# EAGLE board gamyba (EAGLE 8.4.1), part 1 of 3
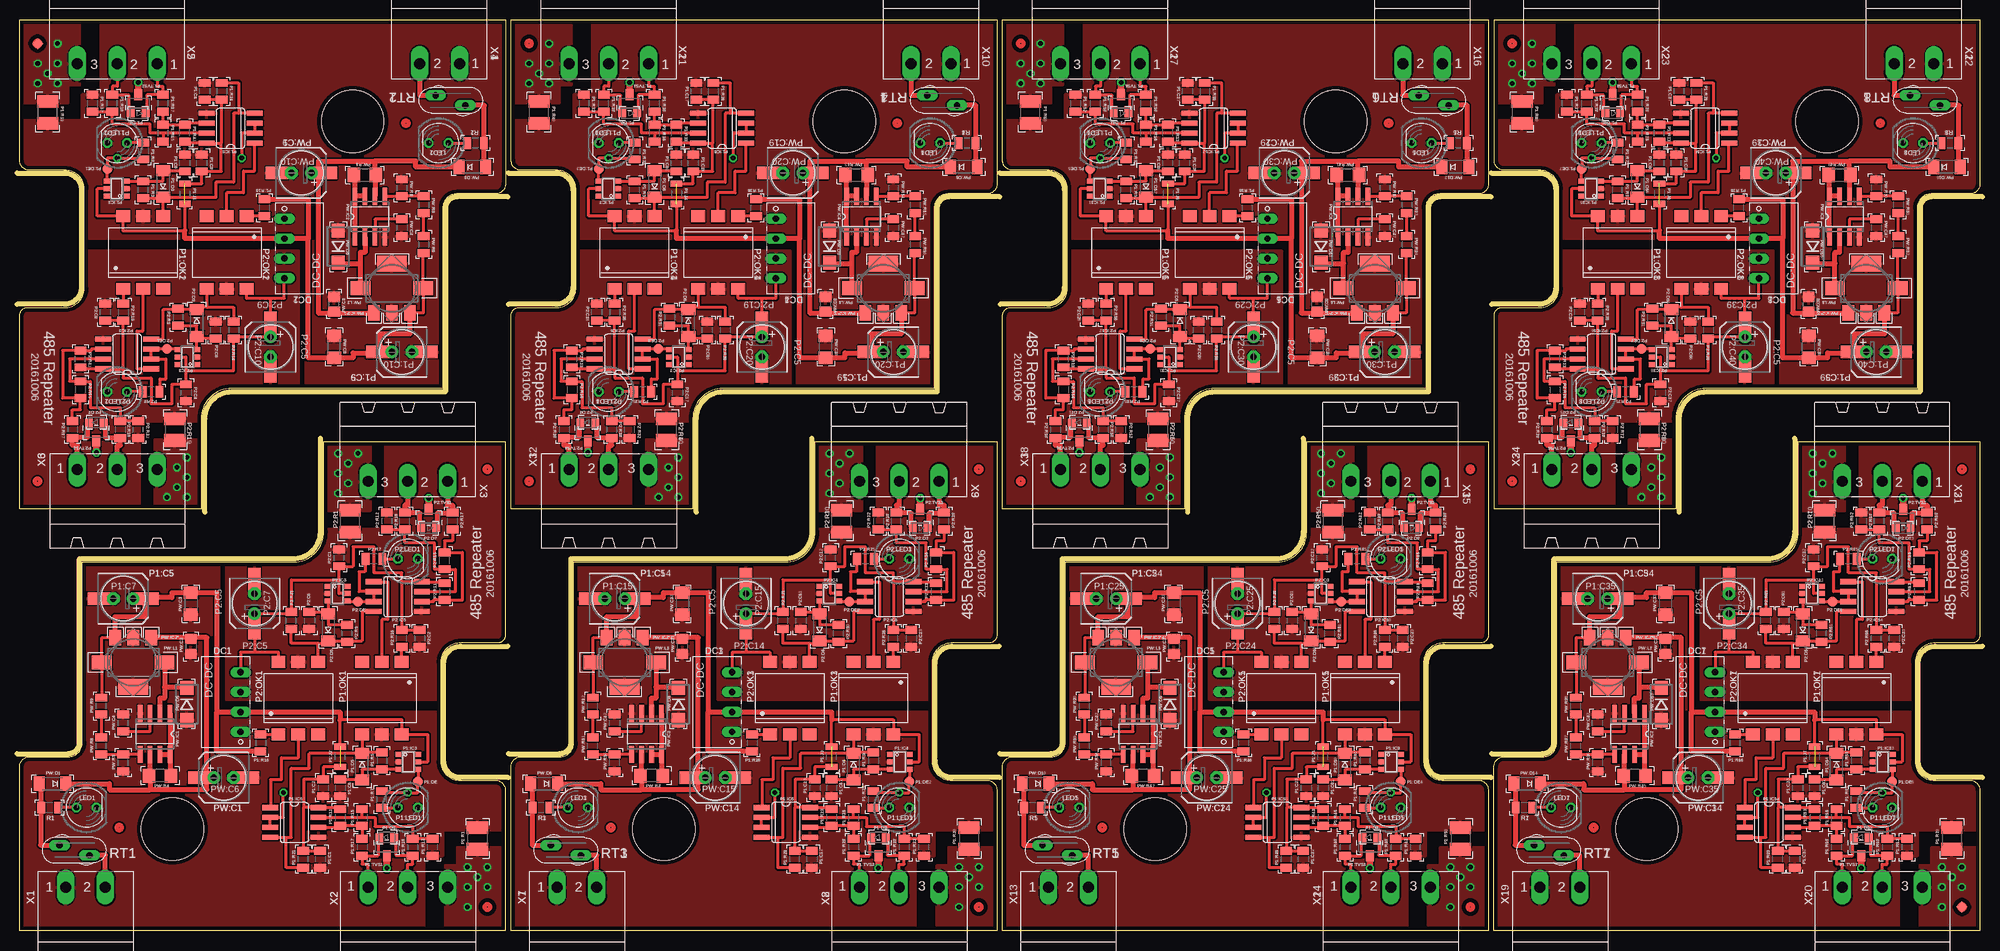
[diagram p0: board, top side]
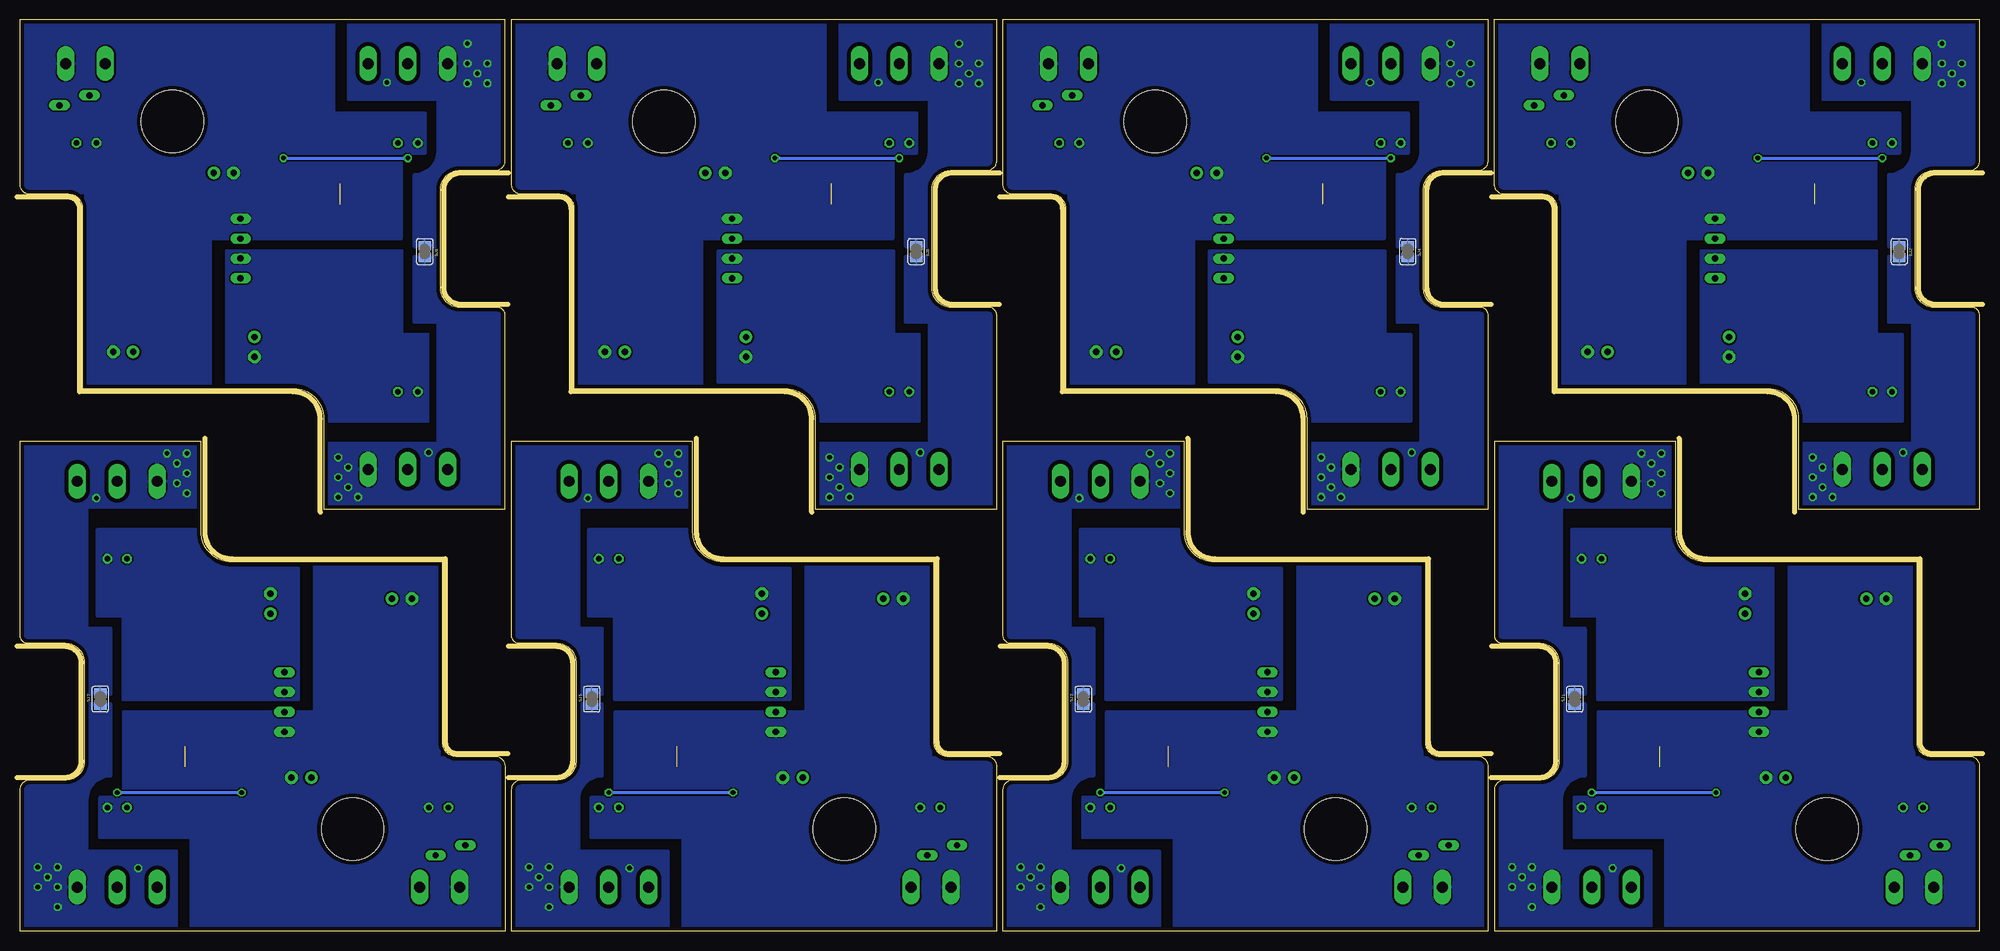
[diagram p1: board, bottom side, seen from below]

Size 250.23 x 116.37 mm. Coordinates in mm from the lower left corner, seen from the top.
Copper layers (1*16): Top 0.035mm / dielectric 1.5mm / Bottom 0.035mm
Design rules "default *": minimum track width 10mil, minimum drill 20mil, track to track 8mil, track to pad 8mil, pad to pad 8mil, via to via 8mil, smd to smd 8mil, copper to edge 20mil, drill to drill 8mil, minimum pad ring 10mil, minimum via ring 8mil, stop-mask expansion 4mil, vias tented up to drill 40mil, thermal gap 6mil
Net classes: 0 default: clearance 0.205 mm; 1 power: clearance 0.205 mm to class 0, clearance 0.305 mm; 2 pe: clearance 0.205 mm to class 0, clearance 0.205 mm to class 1, clearance 0.508 mm
Milling: 92 lines

## Footprints (pad centres in the part's own frame; a part is rotated, then mirrored left to right if it is on the bottom)
NME = drill 0.813 long: 1 0,3.81; 2 0,1.27; 3 0,-1.27; 4 0,-3.81
TP2 = smd 1 x 1 rotated 45: P$1 0,0
LED5MM = drill 0.7 octagon: A -1.27,0; K 1.27,0
C0805 = smd 1 x 1.5: 1 -1.077,0; 2 1.077,0
SANYO-OSCON_SMD_C6 = smd 3.5 x 1.6: + 2.8,0; - -2.8,0
E2,5-6 = drill 0.813 pad 1.6: + -1.27,0 | drill 0.813 pad 1.6 octagon: - 1.27,0
SOD323-R = smd 0.6 x 0.6: A 1.1,0; C -1.1,0
MINIMELF = smd 1.4 x 1.8: A 1.7,0; C -1.7,0
B1,27 = smd 1.27 x 1.27: PP 0,0
SOT23-6 = smd 0.64 x 0.8: 1 -0.95,-1.29; 2 0,-1.29; 3 0.95,-1.29; 4 0.95,1.173; 5 0,1.173; 6 -0.95,1.173
SO08 = smd 0.66 x 2.032: 1 -1.905,-3.073; 2 -0.635,-3.073; 3 0.635,-3.073; 4 1.905,-3.073; 5 1.905,3.073; 6 0.635,3.073; 7 -0.635,3.073; 8 -1.905,3.073
JUMPER_0805 = smd 0.8 x 1.5: 1 -1.3,0; 2 1.3,0
DIL6-SMD = smd 1.78 x 1.52: 1 -2.54,-4.645; 2 0,-4.645; 3 2.54,-4.645; 4 2.54,4.645; 5 0,4.645; 6 -2.54,4.645
R1210 = smd 1.6 x 2.7: 1 -1.4,0; 2 1.4,0
R0805 = smd 1 x 1.5: 1 -1.077,0; 2 1.077,0
SOT23 = smd 1 x 1.4: 1 -0.95,-1.1; 2 0.95,-1.1; 3 0,1.1
C0805' = smd 1.3 x 1.5: 1 -0.95,0; 2 0.95,0
C1206 = smd 1.6 x 1.8: 1 -1.4,0; 2 1.4,0
DO214BA = smd 1.8 x 1.7: A 2.05,0; C -2.05,0
SO08' = smd 0.6 x 2.2: 1 -1.905,-2.6; 2 -0.635,-2.6; 3 0.635,-2.6; 4 1.905,-2.6; 5 1.905,2.6; 6 0.635,2.6; 7 -0.635,2.6; 8 -1.905,2.6
SOT223 = smd 1.5 x 2: 1 -2.3,-3.15; 2 0,-3.15; 3 2.3,-3.15 | smd 3.8 x 2: 4 0,3.15
DR1030 = smd 2.54 x 1.8: 1 -4,0; 2 4,0
R1206 = smd 1.6 x 1.803: 1 -1.422,0; 2 1.422,0
X40 = drill 0.813 long: 1 0,0; 2 3.81,-1.27
SJ = smd 1.168 x 1.6: 1 -0.762,0; 2 0.762,0
PLOKSTE_ISPJAUTA = hole 8: -11,-18
MSTBA2 = drill 1.4 long: 1 -2.54,5.08; 2 2.54,5.08
MSTBA3 = drill 1.4 long: 1 -5.08,5.08; 2 0,5.08; 3 5.08,5.08

## Placement (x,y rotation side)
DC1  5V/5V  [NME]  28.21,29.23 180 top
DC2  5V/5V  [NME]  33.8,87.14 0 top
DC3  5V/5V  [NME]  90.95,29.23 180 top
DC4  5V/5V  [NME]  96.54,87.14 0 top
DC5  5V/5V  [NME]  153.69,29.23 180 top
DC6  5V/5V  [NME]  159.28,87.14 0 top
DC7  5V/5V  [NME]  216.43,29.23 180 top
DC8  5V/5V  [NME]  222.02,87.14 0 top
E$1  REF  [TP2]  2.31,113.31 0 top
E$2  REF  [TP2]  -10.16,-9.52 0 top  (outside the outline)
E$3  REF  [TP2]  247.92,3.07 0 top
E$4  REF  [TP2]  259.84,126.48 0 top  (outside the outline)
LED1  Power  [LED5MM]  8.53,15.77 0 top
LED2  Power  [LED5MM]  53.49,100.6 180 top
LED3  Power  [LED5MM]  71.27,15.77 0 top
LED4  Power  [LED5MM]  116.22,100.6 180 top
LED5  Power  [LED5MM]  134,15.77 0 top
LED6  Power  [LED5MM]  178.96,100.6 180 top
LED7  Power  [LED5MM]  196.74,15.77 0 top
LED8  Power  [LED5MM]  241.7,100.6 180 top
P1:C1  0.1  [C0805]  38.37,9.16 270 top
P1:C2  0.1  [C0805]  38.76,18.31 270 top
P1:C3  0.1  [C0805]  21.1,98.06 90 top
P1:C4  0.1  [C0805]  23.64,107.21 90 top
P1:C5  100x10V  [SANYO-OSCON_SMD_C6]  13.23,42.44 0 top
P1:C6  0.1  [C0805]  40.91,18.31 270 top
P1:C7  100x10V  [E2,5-6]  13.23,42.44 180 top
P1:C8  0.1  [C0805]  23.26,98.06 90 top
P1:C9  100x10V  [SANYO-OSCON_SMD_C6]  48.79,73.93 180 top
P1:C10  100x10V  [E2,5-6]  48.79,73.93 0 top
P1:C11  0.1  [C0805]  103.65,18.31 270 top
P1:C12  0.1  [C0805]  101.11,9.16 270 top
P1:C13  0.1  [C0805]  101.49,18.31 270 top
P1:C14  100x10V  [SANYO-OSCON_SMD_C6]  75.97,42.44 0 top
P1:C15  100x10V  [E2,5-6]  75.97,42.44 180 top
P1:C16  0.1  [C0805]  83.84,98.06 90 top
P1:C17  0.1  [C0805]  86.38,107.21 90 top
P1:C18  0.1  [C0805]  86,98.06 90 top
P1:C19  100x10V  [SANYO-OSCON_SMD_C6]  111.53,73.93 180 top
P1:C20  100x10V  [E2,5-6]  111.53,73.93 0 top
P1:C21  0.1  [C0805]  166.39,18.31 270 top
P1:C22  0.1  [C0805]  163.85,9.16 270 top
P1:C23  0.1  [C0805]  164.23,18.31 270 top
P1:C24  100x10V  [SANYO-OSCON_SMD_C6]  138.7,42.44 0 top
P1:C25  100x10V  [E2,5-6]  138.7,42.44 180 top
P1:C26  0.1  [C0805]  146.58,98.06 90 top
P1:C27  0.1  [C0805]  149.12,107.21 90 top
P1:C28  0.1  [C0805]  148.74,98.06 90 top
P1:C29  100x10V  [SANYO-OSCON_SMD_C6]  174.26,73.93 180 top
P1:C30  100x10V  [E2,5-6]  174.26,73.93 0 top
P1:C31  0.1  [C0805]  229.13,18.31 270 top
P1:C32  0.1  [C0805]  226.59,9.16 270 top
P1:C33  0.1  [C0805]  226.97,18.31 270 top
P1:C34  100x10V  [SANYO-OSCON_SMD_C6]  201.44,42.44 0 top
P1:C35  100x10V  [E2,5-6]  201.44,42.44 180 top
P1:C36  0.1  [C0805]  209.32,98.06 90 top
P1:C37  0.1  [C0805]  211.86,107.21 90 top
P1:C38  0.1  [C0805]  211.48,98.06 90 top
P1:C39  100x10V  [SANYO-OSCON_SMD_C6]  237,73.93 180 top
P1:C40  100x10V  [E2,5-6]  237,73.93 0 top
P1:D1  PESD1LIN  [SOD323-R]  15.13,104.41 180 top
P1:D2  BAS85  [MINIMELF]  18.31,95.4 90 top
P1:D3  PESD1LIN  [SOD323-R]  109.62,11.96 0 top
P1:D4  BAS85  [MINIMELF]  106.45,20.98 270 top
P1:D5  BAS85  [MINIMELF]  43.71,20.98 270 top
P1:D6  PESD1LIN  [SOD323-R]  77.87,104.41 180 top
P1:D7  PESD1LIN  [SOD323-R]  46.88,11.96 0 top
P1:D8  BAS85  [MINIMELF]  81.05,95.4 90 top
P1:D9  PESD1LIN  [SOD323-R]  172.36,11.96 0 top
P1:D10  BAS85  [MINIMELF]  169.18,20.98 270 top
P1:D11  PESD1LIN  [SOD323-R]  140.61,104.41 180 top
P1:D12  BAS85  [MINIMELF]  143.78,95.4 90 top
P1:D13  PESD1LIN  [SOD323-R]  235.1,11.96 0 top
P1:D14  BAS85  [MINIMELF]  231.92,20.98 270 top
P1:D15  PESD1LIN  [SOD323-R]  203.35,104.41 180 top
P1:D16  BAS85  [MINIMELF]  206.52,95.4 90 top
P1:DE  TPB1,27  [B1,27]  50.82,19.07 0 top
P1:DE1  TPB1,27  [B1,27]  11.2,97.3 180 top
P1:DE2  TPB1,27  [B1,27]  113.56,19.07 0 top
P1:DE3  TPB1,27  [B1,27]  73.93,97.3 180 top
P1:DE4  TPB1,27  [B1,27]  176.3,19.07 0 top
P1:DE5  TPB1,27  [B1,27]  136.67,97.3 180 top
P1:DE6  TPB1,27  [B1,27]  239.03,19.07 0 top
P1:DE7  TPB1,27  [B1,27]  199.41,97.3 180 top
P1:IC1  74LVC2G14DBV  [SOT23-6]  12.34,94.76 90 top
P1:IC2  MAX485CSA  [SO08]  26.94,102.51 90 top
P1:IC3  74LVC2G14DBV  [SOT23-6]  49.68,21.61 270 top
P1:IC4  74LVC2G14DBV  [SOT23-6]  112.41,21.61 270 top
P1:IC5  MAX485CSA  [SO08]  35.07,13.86 270 top
P1:IC6  MAX485CSA  [SO08]  97.81,13.86 270 top
P1:IC7  74LVC2G14DBV  [SOT23-6]  75.08,94.76 90 top
P1:IC8  MAX485CSA  [SO08]  89.68,102.51 90 top
P1:IC9  74LVC2G14DBV  [SOT23-6]  175.15,21.61 270 top
P1:IC10  MAX485CSA  [SO08]  160.55,13.86 270 top
P1:IC11  74LVC2G14DBV  [SOT23-6]  137.81,94.76 90 top
P1:IC12  MAX485CSA  [SO08]  152.42,102.51 90 top
P1:IC13  74LVC2G14DBV  [SOT23-6]  237.89,21.61 270 top
P1:IC14  MAX485CSA  [SO08]  223.29,13.86 270 top
P1:IC15  74LVC2G14DBV  [SOT23-6]  200.55,94.76 90 top
P1:IC16  MAX485CSA  [SO08]  215.16,102.51 90 top
P1:J1  0  [JUMPER_0805]  21.1,94.13 270 top
P1:J2  0  [JUMPER_0805]  40.91,22.25 90 top
P1:J3  0  [JUMPER_0805]  103.65,22.25 90 top
P1:J4  0  [JUMPER_0805]  83.84,94.13 270 top
P1:J5  0  [JUMPER_0805]  166.39,22.25 90 top
P1:J6  0  [JUMPER_0805]  146.58,94.13 270 top
P1:J7  0  [JUMPER_0805]  229.13,22.25 90 top
P1:J8  0  [JUMPER_0805]  209.32,94.13 270 top
P1:LED1  Link  [LED5MM]  49.55,15.77 0 top
P1:LED2  Link  [LED5MM]  12.47,100.6 180 top
P1:LED3  Link  [LED5MM]  112.29,15.77 0 top
P1:LED4  Link  [LED5MM]  75.2,100.6 180 top
P1:LED5  Link  [LED5MM]  175.03,15.77 0 top
P1:LED6  Link  [LED5MM]  137.94,100.6 180 top
P1:LED7  Link  [LED5MM]  237.76,15.77 0 top
P1:LED8  Link  [LED5MM]  200.68,100.6 180 top
P1:OK1  H11L1MS  [DIL6-SMD]  46.25,29.74 180 top
P1:OK2  H11L1MS  [DIL6-SMD]  15.77,86.63 0 top
P1:OK3  H11L1MS  [DIL6-SMD]  108.99,29.74 180 top
P1:OK4  H11L1MS  [DIL6-SMD]  78.51,86.63 0 top
P1:OK5  H11L1MS  [DIL6-SMD]  171.72,29.74 180 top
P1:OK6  H11L1MS  [DIL6-SMD]  141.24,86.63 0 top
P1:OK7  H11L1MS  [DIL6-SMD]  234.46,29.74 180 top
P1:OK8  H11L1MS  [DIL6-SMD]  203.98,86.63 0 top
P1:R1  101  [R1210]  58.44,11.83 270 top
P1:R2  103  [R0805]  15.77,94.64 90 top
P1:R3  202  [R0805]  9.29,105.68 270 top
P1:R4  202  [R0805]  21.1,101.87 90 top
P1:R5  103  [R0805]  46.25,21.74 270 top
P1:R6  121  [R0805]  18.31,101.87 90 top
P1:R7  103  [R0805]  46.25,16.78 90 top
P1:R8  103  [R0805]  15.77,99.59 270 top
P1:R9  100  [R0805]  18.31,105.68 90 top
P1:R10  100  [R0805]  11.83,105.68 90 top
P1:R11  202  [R0805]  40.91,14.5 270 top
P1:R12  202  [R0805]  52.73,10.69 90 top
P1:R13  471  [R0805]  31.26,92.35 90 top
P1:R14  472  [R0805]  25.8,107.21 270 top
P1:R15  121  [R0805]  43.71,14.5 270 top
P1:R16  471  [R0805]  30.75,24.02 270 top
P1:R17  100  [R0805]  43.71,10.69 270 top
P1:R18  100  [R0805]  50.19,10.69 270 top
P1:R19  101  [R1210]  3.58,104.54 90 top
P1:R20  103  [R0805]  108.99,21.74 270 top
P1:R21  472  [R0805]  36.21,9.16 90 top
P1:R22  202  [R0805]  115.46,10.69 90 top
P1:R23  202  [R0805]  103.65,14.5 270 top
P1:R24  121  [R0805]  106.45,14.5 270 top
P1:R25  103  [R0805]  108.99,16.78 90 top
P1:R26  100  [R0805]  106.45,10.69 270 top
P1:R27  100  [R0805]  112.92,10.69 270 top
P1:R28  471  [R0805]  93.49,24.02 270 top
P1:R29  472  [R0805]  98.95,9.16 90 top
P1:R30  101  [R1210]  121.18,11.83 270 top
P1:R31  103  [R0805]  78.51,94.64 90 top
P1:R32  202  [R0805]  72.03,105.68 270 top
P1:R33  202  [R0805]  83.84,101.87 90 top
P1:R34  121  [R0805]  81.05,101.87 90 top
P1:R35  103  [R0805]  78.51,99.59 270 top
P1:R36  100  [R0805]  81.05,105.68 90 top
P1:R37  100  [R0805]  74.57,105.68 90 top
P1:R38  471  [R0805]  94,92.35 90 top
P1:R39  472  [R0805]  88.54,107.21 270 top
P1:R40  101  [R1210]  66.31,104.54 90 top
P1:R41  103  [R0805]  171.72,21.74 270 top
P1:R42  202  [R0805]  178.2,10.69 90 top
P1:R43  202  [R0805]  166.39,14.5 270 top
P1:R44  121  [R0805]  169.18,14.5 270 top
P1:R45  103  [R0805]  171.72,16.78 90 top
P1:R46  100  [R0805]  169.18,10.69 270 top
P1:R47  100  [R0805]  175.66,10.69 270 top
P1:R48  471  [R0805]  156.23,24.02 270 top
P1:R49  472  [R0805]  161.69,9.16 90 top
P1:R50  101  [R1210]  183.92,11.83 270 top
P1:R51  103  [R0805]  141.24,94.64 90 top
P1:R52  202  [R0805]  134.77,105.68 270 top
P1:R53  202  [R0805]  146.58,101.87 90 top
P1:R54  121  [R0805]  143.78,101.87 90 top
P1:R55  103  [R0805]  141.24,99.59 270 top
P1:R56  100  [R0805]  143.78,105.68 90 top
P1:R57  100  [R0805]  137.31,105.68 90 top
P1:R58  471  [R0805]  156.74,92.35 90 top
P1:R59  472  [R0805]  151.28,107.21 270 top
P1:R60  101  [R1210]  129.05,104.54 90 top
P1:R61  103  [R0805]  234.46,21.74 270 top
P1:R62  202  [R0805]  240.94,10.69 90 top
P1:R63  202  [R0805]  229.13,14.5 270 top
P1:R64  121  [R0805]  231.92,14.5 270 top
P1:R65  103  [R0805]  234.46,16.78 90 top
P1:R66  100  [R0805]  231.92,10.69 270 top
P1:R67  100  [R0805]  238.4,10.69 270 top
P1:R68  471  [R0805]  218.97,24.02 270 top
P1:R69  472  [R0805]  224.43,9.16 90 top
P1:R70  101  [R1210]  246.65,11.83 270 top
P1:R71  103  [R0805]  203.98,94.64 90 top
P1:R72  202  [R0805]  197.5,105.68 270 top
P1:R73  202  [R0805]  209.32,101.87 90 top
P1:R74  121  [R0805]  206.52,101.87 90 top
P1:R75  103  [R0805]  203.98,99.59 270 top
P1:R76  100  [R0805]  206.52,105.68 90 top
P1:R77  100  [R0805]  200.05,105.68 90 top
P1:R78  471  [R0805]  219.48,92.35 90 top
P1:R79  472  [R0805]  214.01,107.21 270 top
P1:R80  101  [R1210]  191.79,104.54 90 top
P1:TVS1  SM712  [SOT23]  46.88,10.69 180 top
P1:TVS2  SM712  [SOT23]  15.13,105.68 0 top
P1:TVS3  SM712  [SOT23]  109.62,10.69 180 top
P1:TVS4  SM712  [SOT23]  77.87,105.68 0 top
P1:TVS5  SM712  [SOT23]  172.36,10.69 180 top
P1:TVS6  SM712  [SOT23]  140.61,105.68 0 top
P1:TVS7  SM712  [SOT23]  235.1,10.69 180 top
P1:TVS8  SM712  [SOT23]  203.35,105.68 0 top
P2:C1  0.1  [C0805]  40.79,47.64 90 top
P2:C2  0.1  [C0805]  51.07,37.36 270 top
P2:C3  0.1  [C0805]  25.04,76.73 90 top
P2:C4  0.1  [C0805]  21.23,68.73 270 top
P2:C5  100x10V  [SANYO-OSCON_SMD_C6]  29.99,41.8 270 top
P2:C6  0.1  [C0805]  36.98,39.64 270 top
P2:C7  100x10V  [E2,5-6]  29.99,41.8 90 top
P2:C8  0.1  [C0805]  10.94,79.01 90 top
P2:C9  100x10V  [SANYO-OSCON_SMD_C6]  32.02,74.57 90 top
P2:C10  100x10V  [E2,5-6]  32.02,74.57 270 top
P2:C11  0.1  [C0805]  99.72,39.64 270 top
P2:C12  0.1  [C0805]  103.53,47.64 90 top
P2:C13  0.1  [C0805]  113.81,37.36 270 top
P2:C14  100x10V  [SANYO-OSCON_SMD_C6]  92.73,41.8 270 top
P2:C15  100x10V  [E2,5-6]  92.73,41.8 90 top
P2:C16  0.1  [C0805]  87.78,76.73 90 top
P2:C17  0.1  [C0805]  83.97,68.73 270 top
P2:C18  0.1  [C0805]  73.68,79.01 90 top
P2:C19  100x10V  [SANYO-OSCON_SMD_C6]  94.76,74.57 90 top
P2:C20  100x10V  [E2,5-6]  94.76,74.57 270 top
P2:C21  0.1  [C0805]  162.45,39.64 270 top
P2:C22  0.1  [C0805]  166.26,47.64 90 top
P2:C23  0.1  [C0805]  176.55,37.36 270 top
P2:C24  100x10V  [SANYO-OSCON_SMD_C6]  155.47,41.8 270 top
P2:C25  100x10V  [E2,5-6]  155.47,41.8 90 top
P2:C26  0.1  [C0805]  150.51,76.73 90 top
P2:C27  0.1  [C0805]  146.7,68.73 270 top
P2:C28  0.1  [C0805]  136.42,79.01 90 top
P2:C29  100x10V  [SANYO-OSCON_SMD_C6]  157.5,74.57 90 top
P2:C30  100x10V  [E2,5-6]  157.5,74.57 270 top
P2:C31  0.1  [C0805]  225.19,39.64 270 top
P2:C32  0.1  [C0805]  229,47.64 90 top
P2:C33  0.1  [C0805]  239.29,37.36 270 top
P2:C34  100x10V  [SANYO-OSCON_SMD_C6]  218.21,41.8 270 top
P2:C35  100x10V  [E2,5-6]  218.21,41.8 90 top
P2:C36  0.1  [C0805]  213.25,76.73 90 top
P2:C37  0.1  [C0805]  209.44,68.73 270 top
P2:C38  0.1  [C0805]  199.16,79.01 90 top
P2:C39  100x10V  [SANYO-OSCON_SMD_C6]  220.24,74.57 90 top
P2:C40  100x10V  [E2,5-6]  220.24,74.57 270 top
P2:D1  PESD1LIN  [SOD323-R]  9.8,64.92 0 top
P2:D2  BAS85  [MINIMELF]  22.63,77.62 270 top
P2:D3  PESD1LIN  [SOD323-R]  114.95,51.45 180 top
P2:D4  BAS85  [MINIMELF]  102.13,38.76 90 top
P2:D5  BAS85  [MINIMELF]  39.39,38.76 90 top
P2:D6  PESD1LIN  [SOD323-R]  72.54,64.92 0 top
P2:D7  PESD1LIN  [SOD323-R]  52.22,51.45 180 top
P2:D8  BAS85  [MINIMELF]  85.36,77.62 270 top
P2:D9  PESD1LIN  [SOD323-R]  177.69,51.45 180 top
P2:D10  BAS85  [MINIMELF]  164.87,38.76 90 top
P2:D11  PESD1LIN  [SOD323-R]  135.27,64.92 0 top
P2:D12  BAS85  [MINIMELF]  148.1,77.62 270 top
P2:D13  PESD1LIN  [SOD323-R]  240.43,51.45 180 top
P2:D14  BAS85  [MINIMELF]  227.6,38.76 90 top
P2:D15  PESD1LIN  [SOD323-R]  198.01,64.92 0 top
P2:D16  BAS85  [MINIMELF]  210.84,77.62 270 top
P2:DE  TPB1,27  [B1,27]  43.2,42.06 0 top
P2:DE1  TPB1,27  [B1,27]  18.82,74.31 180 top
P2:DE2  TPB1,27  [B1,27]  105.94,42.06 0 top
P2:DE3  TPB1,27  [B1,27]  81.55,74.31 180 top
P2:DE4  TPB1,27  [B1,27]  168.68,42.06 0 top
P2:DE5  TPB1,27  [B1,27]  144.29,74.31 180 top
P2:DE6  TPB1,27  [B1,27]  231.41,42.06 0 top
P2:DE7  TPB1,27  [B1,27]  207.03,74.31 180 top
P2:IC1  74LVC2G14DBV  [SOT23-6]  21.36,73.3 90 top
P2:IC2  MAX485CSA  [SO08]  13.74,73.68 90 top
P2:IC3  74LVC2G14DBV  [SOT23-6]  40.66,43.07 270 top
P2:IC4  74LVC2G14DBV  [SOT23-6]  103.4,43.07 270 top
P2:IC5  MAX485CSA  [SO08]  48.28,42.69 270 top
P2:IC6  MAX485CSA  [SO08]  111.02,42.69 270 top
P2:IC7  74LVC2G14DBV  [SOT23-6]  84.09,73.3 90 top
P2:IC8  MAX485CSA  [SO08]  76.47,73.68 90 top
P2:IC9  74LVC2G14DBV  [SOT23-6]  166.14,43.07 270 top
P2:IC10  MAX485CSA  [SO08]  173.76,42.69 270 top
P2:IC11  74LVC2G14DBV  [SOT23-6]  146.83,73.3 90 top
P2:IC12  MAX485CSA  [SO08]  139.21,73.68 90 top
P2:IC13  74LVC2G14DBV  [SOT23-6]  228.87,43.07 270 top
P2:IC14  MAX485CSA  [SO08]  236.49,42.69 270 top
P2:IC15  74LVC2G14DBV  [SOT23-6]  209.57,73.3 90 top
P2:IC16  MAX485CSA  [SO08]  201.95,73.68 90 top
P2:LED1  Link  [LED5MM]  49.55,47.52 0 top
P2:LED2  Link  [LED5MM]  12.47,68.85 180 top
P2:LED3  Link  [LED5MM]  112.29,47.52 0 top
P2:LED4  Link  [LED5MM]  75.2,68.85 180 top
P2:LED5  Link  [LED5MM]  175.03,47.52 0 top
P2:LED6  Link  [LED5MM]  137.94,68.85 180 top
P2:LED7  Link  [LED5MM]  237.76,47.52 0 top
P2:LED8  Link  [LED5MM]  200.68,68.85 180 top
P2:OK1  H11L1MS  [DIL6-SMD]  35.58,29.74 0 top
P2:OK2  H11L1MS  [DIL6-SMD]  26.44,86.63 180 top
P2:OK3  H11L1MS  [DIL6-SMD]  98.32,29.74 0 top
P2:OK4  H11L1MS  [DIL6-SMD]  89.17,86.63 180 top
P2:OK5  H11L1MS  [DIL6-SMD]  161.06,29.74 0 top
P2:OK6  H11L1MS  [DIL6-SMD]  151.91,86.63 180 top
P2:OK7  H11L1MS  [DIL6-SMD]  223.79,29.74 0 top
P2:OK8  H11L1MS  [DIL6-SMD]  214.65,86.63 180 top
P2:R1  101  [R1210]  42.18,52.34 90 top
P2:R2  103  [R0805]  20.21,78.38 270 top
P2:R3  202  [R0805]  15.13,64.03 90 top
P2:R4  202  [R0805]  7.77,73.05 90 top
P2:R5  103  [R0805]  41.8,37.99 90 top
P2:R6  121  [R0805]  7.77,69.11 270 top
P2:R7  103  [R0805]  45.23,47.52 180 top
P2:R8  103  [R0805]  16.78,68.85 0 top
P2:R9  100  [R0805]  6.75,64.03 270 top
P2:R10  100  [R0805]  12.85,64.03 270 top
P2:R11  202  [R0805]  54.25,43.33 270 top
P2:R12  202  [R0805]  46.88,52.34 270 top
P2:R13  471  [R0805]  13.23,79.01 270 top
P2:R14  472  [R0805]  27.32,76.73 270 top
P2:R15  121  [R0805]  54.25,47.26 90 top
P2:R16  471  [R0805]  48.79,37.36 90 top
P2:R17  100  [R0805]  55.27,52.34 90 top
P2:R18  100  [R0805]  49.17,52.34 90 top
P2:R19  101  [R1210]  19.83,64.03 270 top
P2:R20  103  [R0805]  104.54,37.99 90 top
P2:R21  472  [R0805]  34.69,39.64 90 top
P2:R22  202  [R0805]  109.62,52.34 270 top
P2:R23  202  [R0805]  116.99,43.33 270 top
P2:R24  121  [R0805]  116.99,47.26 90 top
P2:R25  103  [R0805]  107.97,47.52 180 top
P2:R26  100  [R0805]  118,52.34 90 top
P2:R27  100  [R0805]  111.91,52.34 90 top
P2:R28  471  [R0805]  111.53,37.36 90 top
P2:R29  472  [R0805]  97.43,39.64 90 top
P2:R30  101  [R1210]  104.92,52.34 90 top
P2:R31  103  [R0805]  82.95,78.38 270 top
P2:R32  202  [R0805]  77.87,64.03 90 top
P2:R33  202  [R0805]  70.5,73.05 90 top
P2:R34  121  [R0805]  70.5,69.11 270 top
P2:R35  103  [R0805]  79.52,68.85 0 top
P2:R36  100  [R0805]  69.49,64.03 270 top
P2:R37  100  [R0805]  75.58,64.03 270 top
P2:R38  471  [R0805]  75.97,79.01 270 top
P2:R39  472  [R0805]  90.06,76.73 270 top
P2:R40  101  [R1210]  82.57,64.03 270 top
P2:R41  103  [R0805]  167.28,37.99 90 top
P2:R42  202  [R0805]  172.36,52.34 270 top
P2:R43  202  [R0805]  179.73,43.33 270 top
P2:R44  121  [R0805]  179.73,47.26 90 top
P2:R45  103  [R0805]  170.71,47.52 180 top
P2:R46  100  [R0805]  180.74,52.34 90 top
P2:R47  100  [R0805]  174.64,52.34 90 top
P2:R48  471  [R0805]  174.26,37.36 90 top
P2:R49  472  [R0805]  160.17,39.64 90 top
P2:R50  101  [R1210]  167.66,52.34 90 top
P2:R51  103  [R0805]  145.69,78.38 270 top
P2:R52  202  [R0805]  140.61,64.03 90 top
P2:R53  202  [R0805]  133.24,73.05 90 top
P2:R54  121  [R0805]  133.24,69.11 270 top
P2:R55  103  [R0805]  142.26,68.85 0 top
P2:R56  100  [R0805]  132.23,64.03 270 top
P2:R57  100  [R0805]  138.32,64.03 270 top
P2:R58  471  [R0805]  138.7,79.01 270 top
P2:R59  472  [R0805]  152.8,76.73 270 top
P2:R60  101  [R1210]  145.31,64.03 270 top
P2:R61  103  [R0805]  230.02,37.99 90 top
P2:R62  202  [R0805]  235.1,52.34 270 top
P2:R63  202  [R0805]  242.46,43.33 270 top
P2:R64  121  [R0805]  242.46,47.26 90 top
P2:R65  103  [R0805]  233.45,47.52 180 top
P2:R66  100  [R0805]  243.48,52.34 90 top
P2:R67  100  [R0805]  237.38,52.34 90 top
P2:R68  471  [R0805]  237,37.36 90 top
P2:R69  472  [R0805]  222.9,39.64 90 top
P2:R70  101  [R1210]  230.4,52.34 90 top
P2:R71  103  [R0805]  208.43,78.38 270 top
P2:R72  202  [R0805]  203.35,64.03 90 top
P2:R73  202  [R0805]  195.98,73.05 90 top
P2:R74  121  [R0805]  195.98,69.11 270 top
P2:R75  103  [R0805]  205,68.85 0 top
P2:R76  100  [R0805]  194.96,64.03 270 top
P2:R77  100  [R0805]  201.06,64.03 270 top
P2:R78  471  [R0805]  201.44,79.01 270 top
P2:R79  472  [R0805]  215.54,76.73 270 top
P2:R80  101  [R1210]  208.05,64.03 270 top
P2:TVS1  SM712  [SOT23]  52.22,52.73 0 top
P2:TVS2  SM712  [SOT23]  9.8,63.65 180 top
P2:TVS3  SM712  [SOT23]  114.95,52.73 0 top
P2:TVS4  SM712  [SOT23]  72.54,63.65 180 top
P2:TVS5  SM712  [SOT23]  177.69,52.73 0 top
P2:TVS6  SM712  [SOT23]  135.27,63.65 180 top
P2:TVS7  SM712  [SOT23]  240.43,52.73 0 top
P2:TVS8  SM712  [SOT23]  198.01,63.65 180 top
PW:C1  47x35V  [SANYO-OSCON_SMD_C6]  26.05,19.58 180 top
PW:C2  10n  [C0805']  21.86,36.34 270 top
PW:C3  1.0  [C1206]  21.86,41.8 270 top
PW:C4  470  [C0805]  13.23,26.56 90 top
PW:C5  10n  [C0805']  40.15,80.03 90 top
PW:C6  47x35V  [E2,5-6]  26.05,19.58 0 top
PW:C7  470  [C0805]  48.79,89.81 270 top
PW:C8  1.0  [C1206]  40.15,74.57 90 top
PW:C9  47x35V  [SANYO-OSCON_SMD_C6]  35.96,96.79 0 top
PW:C10  47x35V  [E2,5-6]  35.96,96.79 180 top
PW:C11  10n  [C0805']  84.6,36.34 270 top
PW:C12  470  [C0805]  75.97,26.56 90 top
PW:C13  1.0  [C1206]  84.6,41.8 270 top
PW:C14  47x35V  [SANYO-OSCON_SMD_C6]  88.79,19.58 180 top
PW:C15  47x35V  [E2,5-6]  88.79,19.58 0 top
PW:C16  10n  [C0805']  102.89,80.03 90 top
PW:C17  470  [C0805]  111.53,89.81 270 top
PW:C18  1.0  [C1206]  102.89,74.57 90 top
PW:C19  47x35V  [SANYO-OSCON_SMD_C6]  98.7,96.79 0 top
PW:C20  47x35V  [E2,5-6]  98.7,96.79 180 top
PW:C21  10n  [C0805']  147.34,36.34 270 top
PW:C22  470  [C0805]  138.7,26.56 90 top
PW:C23  1.0  [C1206]  147.34,41.8 270 top
PW:C24  47x35V  [SANYO-OSCON_SMD_C6]  151.53,19.58 180 top
PW:C25  47x35V  [E2,5-6]  151.53,19.58 0 top
PW:C26  10n  [C0805']  165.63,80.03 90 top
PW:C27  470  [C0805]  174.26,89.81 270 top
PW:C28  1.0  [C1206]  165.63,74.57 90 top
PW:C29  47x35V  [SANYO-OSCON_SMD_C6]  161.44,96.79 0 top
PW:C30  47x35V  [E2,5-6]  161.44,96.79 180 top
PW:C31  10n  [C0805']  210.08,36.34 270 top
PW:C32  470  [C0805]  201.44,26.56 90 top
PW:C33  1.0  [C1206]  210.08,41.8 270 top
PW:C34  47x35V  [SANYO-OSCON_SMD_C6]  214.27,19.58 180 top
PW:C35  47x35V  [E2,5-6]  214.27,19.58 0 top
PW:C36  10n  [C0805']  228.37,80.03 90 top
PW:C37  470  [C0805]  237,89.81 270 top
PW:C38  1.0  [C1206]  228.37,74.57 90 top
PW:C39  47x35V  [SANYO-OSCON_SMD_C6]  224.18,96.79 0 top
PW:C40  47x35V  [E2,5-6]  224.18,96.79 180 top
PW:D1  LL4148  [MINIMELF]  4.21,18.82 180 top
PW:D2  10MQ100  [DO214BA]  40.66,87.4 90 top
PW:D3  LL4148  [MINIMELF]  57.8,97.56 0 top
PW:D4  10MQ100  [DO214BA]  84.09,28.98 270 top
PW:D5  10MQ100  [DO214BA]  21.36,28.98 270 top
PW:D6  LL4148  [MINIMELF]  66.95,18.82 180 top
PW:D7  10MQ100  [DO214BA]  103.4,87.4 90 top
PW:D8  LL4148  [MINIMELF]  120.54,97.56 0 top
PW:D9  10MQ100  [DO214BA]  146.83,28.98 270 top
PW:D10  LL4148  [MINIMELF]  129.69,18.82 180 top
PW:D11  10MQ100  [DO214BA]  166.14,87.4 90 top
PW:D12  LL4148  [MINIMELF]  183.28,97.56 0 top
PW:D13  10MQ100  [DO214BA]  209.57,28.98 270 top
PW:D14  LL4148  [MINIMELF]  192.43,18.82 180 top
PW:D15  10MQ100  [DO214BA]  228.87,87.4 90 top
PW:D16  LL4148  [MINIMELF]  246.02,97.56 0 top
PW:IC1  MC34063AD  [SO08']  17.29,25.17 180 top
PW:IC2  MC34063AD  [SO08']  44.72,91.21 0 top
PW:IC2*  LM340-DCY  [SOT223]  14.5,34.31 180 top
PW:IC2*1  LM340-DCY  [SOT223]  47.52,82.06 0 top
PW:IC2*2  LM340-DCY  [SOT223]  77.24,34.31 180 top
PW:IC2*3  LM340-DCY  [SOT223]  110.26,82.06 0 top
PW:IC2*4  LM340-DCY  [SOT223]  139.97,34.31 180 top
PW:IC2*5  LM340-DCY  [SOT223]  172.99,82.06 0 top
PW:IC2*6  LM340-DCY  [SOT223]  202.71,34.31 180 top
PW:IC2*7  LM340-DCY  [SOT223]  235.73,82.06 0 top
PW:IC3  MC34063AD  [SO08']  80.03,25.17 180 top
PW:IC4  MC34063AD  [SO08']  107.46,91.21 0 top
PW:IC5  MC34063AD  [SO08']  142.77,25.17 180 top
PW:IC6  MC34063AD  [SO08']  170.2,91.21 0 top
PW:IC7  MC34063AD  [SO08']  205.51,25.17 180 top
PW:IC8  MC34063AD  [SO08']  232.94,91.21 0 top
PW:L1  330uH  [DR1030]  14.5,34.31 180 top
PW:L2  330uH  [DR1030]  47.52,82.06 0 top
PW:L3  330uH  [DR1030]  77.24,34.31 180 top
PW:L4  330uH  [DR1030]  110.26,82.06 0 top
PW:L5  330uH  [DR1030]  139.97,34.31 180 top
PW:L6  330uH  [DR1030]  172.99,82.06 0 top
PW:L7  330uH  [DR1030]  202.71,34.31 180 top
PW:L8  330uH  [DR1030]  235.73,82.06 0 top
PW:R1  1.0  [R1206]  44.09,96.54 180 top
PW:R2  472  [R0805]  48.79,94.89 270 top
PW:R3  123  [R0805]  51.58,92.73 270 top
PW:R4  1.0  [R1206]  17.93,19.83 0 top
PW:R5  472  [R0805]  13.23,21.48 90 top
PW:R6  202  [R0805]  51.58,87.65 270 top
PW:R7  1.0  [R1206]  80.66,19.83 0 top
PW:R8  123  [R0805]  10.43,23.64 90 top
PW:R9  202  [R0805]  10.43,28.72 90 top
PW:R10  472  [R0805]  75.97,21.48 90 top
PW:R11  123  [R0805]  73.17,23.64 90 top
PW:R12  202  [R0805]  73.17,28.72 90 top
PW:R13  1.0  [R1206]  106.83,96.54 180 top
PW:R14  472  [R0805]  111.53,94.89 270 top
PW:R15  123  [R0805]  114.32,92.73 270 top
PW:R16  202  [R0805]  114.32,87.65 270 top
PW:R17  1.0  [R1206]  143.4,19.83 0 top
PW:R18  472  [R0805]  138.7,21.48 90 top
PW:R19  123  [R0805]  135.91,23.64 90 top
PW:R20  202  [R0805]  135.91,28.72 90 top
PW:R21  1.0  [R1206]  169.56,96.54 180 top
PW:R22  472  [R0805]  174.26,94.89 270 top
PW:R23  123  [R0805]  177.06,92.73 270 top
PW:R24  202  [R0805]  177.06,87.65 270 top
PW:R25  1.0  [R1206]  206.14,19.83 0 top
PW:R26  472  [R0805]  201.44,21.48 90 top
PW:R27  123  [R0805]  198.65,23.64 90 top
PW:R28  202  [R0805]  198.65,28.72 90 top
PW:R29  1.0  [R1206]  232.3,96.54 180 top
PW:R30  472  [R0805]  237,94.89 270 top
PW:R31  123  [R0805]  239.8,92.73 270 top
PW:R32  202  [R0805]  239.8,87.65 270 top
R1  472  [R0805]  3.83,15.77 0 top
R2  472  [R0805]  58.19,100.6 180 top
R3  472  [R0805]  66.57,15.77 0 top
R4  472  [R0805]  120.92,100.6 180 top
R5  472  [R0805]  129.31,15.77 0 top
R6  472  [R0805]  183.66,100.6 180 top
R7  472  [R0805]  192.04,15.77 0 top
R8  472  [R0805]  246.4,100.6 180 top
RT1  100mA  [X40]  8.91,9.67 180 top
RT2  100mA  [X40]  53.11,106.7 0 top
RT3  100mA  [X40]  71.65,9.67 180 top
RT4  100mA  [X40]  115.84,106.7 0 top
RT5  100mA  [X40]  134.39,9.67 180 top
RT6  100mA  [X40]  178.58,106.7 0 top
RT7  100mA  [X40]  197.12,9.67 180 top
RT8  100mA  [X40]  241.32,106.7 0 top
SJ1  [SJ]  51.71,29.61 90 bottom
SJ2  [SJ]  10.31,86.76 270 bottom
SJ3  [SJ]  114.45,29.61 90 bottom
SJ4  [SJ]  73.05,86.76 270 bottom
SJ5  [SJ]  177.19,29.61 90 bottom
SJ6  [SJ]  135.78,86.76 270 bottom
SJ7  [SJ]  239.92,29.61 90 bottom
SJ8  [SJ]  198.52,86.76 270 bottom
U$1  [PLOKSTE_ISPJAUTA]  31.52,85.36 180 top
U$2  [PLOKSTE_ISPJAUTA]  30.5,31.01 0 top
U$3  [PLOKSTE_ISPJAUTA]  93.24,31.01 0 top
U$4  [PLOKSTE_ISPJAUTA]  94.25,85.36 180 top
U$5  [PLOKSTE_ISPJAUTA]  155.98,31.01 0 top
U$6  [PLOKSTE_ISPJAUTA]  156.99,85.36 180 top
U$7  [PLOKSTE_ISPJAUTA]  218.71,31.01 0 top
U$8  [PLOKSTE_ISPJAUTA]  219.73,85.36 180 top
X1  POWER  [MSTBA2]  8.4,0.53 0 top
X2  RS1  [MSTBA3]  49.55,0.53 0 top
X3  RS2  [MSTBA3]  49.55,62.5 180 top
X4  POWER  [MSTBA2]  53.61,115.84 180 top
X5  RS1  [MSTBA3]  12.47,115.84 180 top
X6  RS2  [MSTBA3]  12.47,53.87 0 top
X7  POWER  [MSTBA2]  71.14,0.53 0 top
X8  RS1  [MSTBA3]  112.29,0.53 0 top
X9  RS2  [MSTBA3]  112.29,62.5 180 top
X10  POWER  [MSTBA2]  116.35,115.84 180 top
X11  RS1  [MSTBA3]  75.2,115.84 180 top
X12  RS2  [MSTBA3]  75.2,53.87 0 top
X13  POWER  [MSTBA2]  133.88,0.53 0 top
X14  RS1  [MSTBA3]  175.03,0.53 0 top
X15  RS2  [MSTBA3]  175.03,62.5 180 top
X16  POWER  [MSTBA2]  179.09,115.84 180 top
X17  RS1  [MSTBA3]  137.94,115.84 180 top
X18  RS2  [MSTBA3]  137.94,53.87 0 top
X19  POWER  [MSTBA2]  196.62,0.53 0 top
X20  RS1  [MSTBA3]  237.76,0.53 0 top
X21  RS2  [MSTBA3]  237.76,62.5 180 top
X22  POWER  [MSTBA2]  241.83,115.84 180 top
X23  RS1  [MSTBA3]  200.68,115.84 180 top
X24  RS2  [MSTBA3]  200.68,53.87 0 top

## Library data of the parts
DC1-DC8 = dc-dc-converter
E$1-E$4 = solpad
LED1-LED8 P1:LED1-P1:LED8 P2:LED1-P2:LED8 = led
P1:C1-P1:C4 P1:C6 P1:C8 P1:C11-P1:C13 P1:C16-P1:C18 P1:C21-P1:C23 P1:C26-P1:C28 P1:C31-P1:C33 P1:C36-P1:C38 P1:R1-P1:R80 P2:C1-P2:C4 P2:C6 P2:C8 P2:C11-P2:C13 P2:C16-P2:C18 P2:C21-P2:C23 P2:C26-P2:C28 P2:C31-P2:C33 P2:C36-P2:C38 P2:R1-P2:R80 R1-R8 = rcl
P1:C5 P1:C7 P1:C9 P1:C10 P1:C14 P1:C15 P1:C19 P1:C20 P1:C24 P1:C25 P1:C29 P1:C30 P1:C34 P1:C35 P1:C39 P1:C40 P2:C5 P2:C7 P2:C9 P2:C10 P2:C14 P2:C15 P2:C19 P2:C20 P2:C24 P2:C25 P2:C29 P2:C30 P2:C34 P2:C35 P2:C39 P2:C40 PW:C1 PW:C6 PW:C9 PW:C10 PW:C14 PW:C15 PW:C19 PW:C20 PW:C24 PW:C25 PW:C29 PW:C30 PW:C34 PW:C35 PW:C39 PW:C40 = rcl; PRICE: 1.10
P1:D1 P1:D3 P1:D6 P1:D7 P1:D9 P1:D11 P1:D13 P1:D15 P1:IC1 P1:IC3 P1:IC4 P1:IC7 P1:IC9 P1:IC11 P1:IC13 P1:IC15 P1:TVS1-P1:TVS8 P2:D1 P2:D3 P2:D6 P2:D7 P2:D9 P2:D11 P2:D13 P2:D15 P2:IC1 P2:IC3 P2:IC4 P2:IC7 P2:IC9 P2:IC11 P2:IC13 P2:IC15 P2:TVS1-P2:TVS8 U$1-U$8 = repeater
P1:D2 P1:D4 P1:D5 P1:D8 P1:D10 P1:D12 P1:D14 P1:D16 P2:D2 P2:D4 P2:D5 P2:D8 P2:D10 P2:D12 P2:D14 P2:D16 PW:D1-PW:D16 = diode
P1:DE P1:DE1-P1:DE7 P2:DE P2:DE1-P2:DE7 = testpad
P1:IC2 P1:IC5 P1:IC6 P1:IC8 P1:IC10 P1:IC12 P1:IC14 P1:IC16 P2:IC2 P2:IC5 P2:IC6 P2:IC8 P2:IC10 P2:IC12 P2:IC14 P2:IC16 = linear; VENT_CODE: ZELM048
P1:J1-P1:J8 RT1-RT8 = descreet
P1:OK1-P1:OK8 P2:OK1-P2:OK8 = optocoupler
PW:C2 PW:C5 PW:C11 PW:C16 PW:C21 PW:C26 PW:C31 PW:C36 = touch; NOM_NR: ZKN
PW:C3 PW:C4 PW:C7 PW:C8 PW:C12 PW:C13 PW:C17 PW:C18 PW:C22 PW:C23 PW:C27 PW:C28 PW:C32 PW:C33 PW:C37 PW:C38 PW:R2 PW:R3 PW:R5 PW:R6 PW:R8-PW:R12 PW:R14-PW:R16 PW:R18-PW:R20 PW:R22-PW:R24 PW:R26-PW:R28 PW:R30-PW:R32 = rcl; PRICE: 0.01
PW:IC1-PW:IC8 = touch; VENT_CODE: ZELM041
PW:IC2* PW:IC2*1-PW:IC2*7 PW:L1-PW:L8 = touch
PW:R1 PW:R4 PW:R7 PW:R13 PW:R17 PW:R21 PW:R25 PW:R29 = touch; NOM_NR: ZELRS019; PRICE: 0.02
SJ1-SJ8 = jumper
X1-X24 = con-phoenix-508

## Nets
+24V [power]: PW:D1.A R1.1 RT1.2
+24V1 [power]: PW:D3.A R2.1 RT2.2
+24V2 [power]: PW:D6.A R3.1 RT3.2
+24V3 [power]: PW:D8.A R4.1 RT4.2
+24V4 [power]: PW:D10.A R5.1 RT5.2
+24V5 [power]: PW:D12.A R6.1 RT6.2
+24V6 [power]: PW:D14.A R7.1 RT7.2
+24V7 [power]: PW:D16.A R8.1 RT8.2
GND1: DC1.1 LED1.K P1:C1.2 P1:C2.2 P1:C5.- P1:C6.2 P1:C7.- P1:IC3.2 P1:IC5.5 P1:LED1.K P1:OK1.5 P1:R1.1 P1:R12.1 PW:C1.- PW:C2.2 PW:C3.2 PW:C4.2 PW:C6.- PW:D5.A PW:IC1.4 PW:IC2*.2 PW:IC2*.4 PW:R5.1 X1.1
GND2: DC1.3 P2:C1.2 P2:C2.2 P2:C5.- P2:C6.2 P2:C7.- P2:IC3.2 P2:IC5.5 P2:LED1.K P2:OK1.5 P2:R1.1 P2:R12.1
GND3: DC2.3 P2:C3.2 P2:C4.2 P2:C8.2 P2:C9.- P2:C10.- P2:IC1.2 P2:IC2.5 P2:LED2.K P2:OK2.5 P2:R3.1 P2:R19.1
GND4: DC2.1 LED2.K P1:C3.2 P1:C4.2 P1:C8.2 P1:C9.- P1:C10.- P1:IC1.2 P1:IC2.5 P1:LED2.K P1:OK2.5 P1:R3.1 P1:R19.1 PW:C5.2 PW:C7.2 PW:C8.2 PW:C9.- PW:C10.- PW:D2.A PW:IC2*1.2 PW:IC2*1.4 PW:IC2.4 PW:R2.1 X4.1
GND5: DC3.3 P2:C11.2 P2:C12.2 P2:C13.2 P2:C14.- P2:C15.- P2:IC4.2 P2:IC6.5 P2:LED3.K P2:OK3.5 P2:R22.1 P2:R30.1
GND6: DC3.1 LED3.K P1:C11.2 P1:C12.2 P1:C13.2 P1:C14.- P1:C15.- P1:IC4.2 P1:IC6.5 P1:LED3.K P1:OK3.5 P1:R22.1 P1:R30.1 PW:C11.2 PW:C12.2 PW:C13.2 PW:C14.- PW:C15.- PW:D4.A PW:IC2*2.2 PW:IC2*2.4 PW:IC3.4 PW:R10.1 X7.1
GND7: DC4.3 P2:C16.2 P2:C17.2 P2:C18.2 P2:C19.- P2:C20.- P2:IC7.2 P2:IC8.5 P2:LED4.K P2:OK4.5 P2:R32.1 P2:R40.1
GND8: DC4.1 LED4.K P1:C16.2 P1:C17.2 P1:C18.2 P1:C19.- P1:C20.- P1:IC7.2 P1:IC8.5 P1:LED4.K P1:OK4.5 P1:R32.1 P1:R40.1 PW:C16.2 PW:C17.2 PW:C18.2 PW:C19.- PW:C20.- PW:D7.A PW:IC2*3.2 PW:IC2*3.4 PW:IC4.4 PW:R14.1 X10.1
GND9: DC5.3 P2:C21.2 P2:C22.2 P2:C23.2 P2:C24.- P2:C25.- P2:IC9.2 P2:IC10.5 P2:LED5.K P2:OK5.5 P2:R42.1 P2:R50.1
GND10: DC5.1 LED5.K P1:C21.2 P1:C22.2 P1:C23.2 P1:C24.- P1:C25.- P1:IC9.2 P1:IC10.5 P1:LED5.K P1:OK5.5 P1:R42.1 P1:R50.1 PW:C21.2 PW:C22.2 PW:C23.2 PW:C24.- PW:C25.- PW:D9.A PW:IC2*4.2 PW:IC2*4.4 PW:IC5.4 PW:R18.1 X13.1
GND11: DC6.3 P2:C26.2 P2:C27.2 P2:C28.2 P2:C29.- P2:C30.- P2:IC11.2 P2:IC12.5 P2:LED6.K P2:OK6.5 P2:R52.1 P2:R60.1
GND12: DC6.1 LED6.K P1:C26.2 P1:C27.2 P1:C28.2 P1:C29.- P1:C30.- P1:IC11.2 P1:IC12.5 P1:LED6.K P1:OK6.5 P1:R52.1 P1:R60.1 PW:C26.2 PW:C27.2 PW:C28.2 PW:C29.- PW:C30.- PW:D11.A PW:IC2*5.2 PW:IC2*5.4 PW:IC6.4 PW:R22.1 X16.1
GND13: DC7.3 P2:C31.2 P2:C32.2 P2:C33.2 P2:C34.- P2:C35.- P2:IC13.2 P2:IC14.5 P2:LED7.K P2:OK7.5 P2:R62.1 P2:R70.1
GND14: DC7.1 LED7.K P1:C31.2 P1:C32.2 P1:C33.2 P1:C34.- P1:C35.- P1:IC13.2 P1:IC14.5 P1:LED7.K P1:OK7.5 P1:R62.1 P1:R70.1 PW:C31.2 PW:C32.2 PW:C33.2 PW:C34.- PW:C35.- PW:D13.A PW:IC2*6.2 PW:IC2*6.4 PW:IC7.4 PW:R26.1 X19.1
GND15: DC8.3 P2:C36.2 P2:C37.2 P2:C38.2 P2:C39.- P2:C40.- P2:IC15.2 P2:IC16.5 P2:LED8.K P2:OK8.5 P2:R72.1 P2:R80.1
GND16: DC8.1 LED8.K P1:C36.2 P1:C37.2 P1:C38.2 P1:C39.- P1:C40.- P1:IC15.2 P1:IC16.5 P1:LED8.K P1:OK8.5 P1:R72.1 P1:R80.1 PW:C36.2 PW:C37.2 PW:C38.2 PW:C39.- PW:C40.- PW:D15.A PW:IC2*7.2 PW:IC2*7.4 PW:IC8.4 PW:R30.1 X22.1
N$1: LED1.A R1.2
N$2 [power]: RT1.1 X1.2
N$3: P1:R13.1 P2:OK2.1
N$4: P1:OK2.1 P2:R13.1
N$5: P1:IC2.1 P2:OK2.2
N$6: P1:OK2.2 P2:IC2.1
N$7 [power]: RT2.1 X4.2
N$8: LED2.A R2.2
N$9: P1:R28.1 P2:OK3.1
N$10: P1:OK3.1 P2:R28.1
N$11: P1:IC6.1 P2:OK3.2
N$12: P1:R16.1 P2:OK1.1
N$13: P1:IC5.1 P2:OK1.2
N$14: P1:OK1.1 P2:R16.1
N$15: P1:OK1.2 P2:IC5.1
N$16: P1:OK3.2 P2:IC6.1
N$17 [power]: RT3.1 X7.2
N$18: LED3.A R3.2
N$19: P1:R38.1 P2:OK4.1
N$20: P1:OK4.1 P2:R38.1
N$21: P1:IC8.1 P2:OK4.2
N$22: P1:OK4.2 P2:IC8.1
N$23 [power]: RT4.1 X10.2
N$24: LED4.A R4.2
N$25: P1:R48.1 P2:OK5.1
N$26: P1:OK5.1 P2:R48.1
N$27: P1:IC10.1 P2:OK5.2
N$28: P1:OK5.2 P2:IC10.1
N$29 [power]: RT5.1 X13.2
N$30: LED5.A R5.2
N$31: P1:R58.1 P2:OK6.1
N$32: P1:OK6.1 P2:R58.1
N$33: P1:IC12.1 P2:OK6.2
N$34: P1:OK6.2 P2:IC12.1
N$35 [power]: RT6.1 X16.2
N$36: LED6.A R6.2
N$37: P1:R68.1 P2:OK7.1
N$38: P1:OK7.1 P2:R68.1
N$39: P1:IC14.1 P2:OK7.2
N$40: P1:OK7.2 P2:IC14.1
N$41 [power]: RT7.1 X19.2
N$42: LED7.A R7.2
N$43: P1:R78.1 P2:OK8.1
N$44: P1:OK8.1 P2:R78.1
N$45: P1:IC16.1 P2:OK8.2
N$46: P1:OK8.2 P2:IC16.1
N$47 [power]: RT8.1 X22.2
N$48: LED8.A R8.2
P1:LED+: P1:DE.PP P1:IC3.4 P1:IC5.2 P1:IC5.3 P1:R7.2
P1:LED+1: P1:DE1.PP P1:IC1.4 P1:IC2.2 P1:IC2.3 P1:R8.2
P1:LED+2: P1:DE2.PP P1:IC4.4 P1:IC6.2 P1:IC6.3 P1:R25.2
P1:LED+3: P1:DE3.PP P1:IC7.4 P1:IC8.2 P1:IC8.3 P1:R35.2
P1:LED+4: P1:DE4.PP P1:IC9.4 P1:IC10.2 P1:IC10.3 P1:R45.2
P1:LED+5: P1:DE5.PP P1:IC11.4 P1:IC12.2 P1:IC12.3 P1:R55.2
P1:LED+6: P1:DE6.PP P1:IC13.4 P1:IC14.2 P1:IC14.3 P1:R65.2
P1:LED+7: P1:DE7.PP P1:IC15.4 P1:IC16.2 P1:IC16.3 P1:R75.2
P1:N$1: P1:LED1.A P1:R7.1
P1:N$2: P1:IC5.7 P1:R12.2 P1:R15.1 P1:R18.1
P1:N$3: P1:IC5.6 P1:R11.2 P1:R15.2 P1:R17.1
P1:N$4: P1:C3.1 P1:D2.A P1:IC1.3 P1:R2.2
P1:N$5: P1:IC2.7 P1:R3.2 P1:R6.1 P1:R10.1
P1:N$6: P1:IC2.6 P1:R4.2 P1:R6.2 P1:R9.1
P1:N$7: P1:C6.1 P1:D5.A P1:IC3.3 P1:R5.2
P1:N$8: P1:LED2.A P1:R8.1
P1:N$9: P1:C11.1 P1:D4.A P1:IC4.3 P1:R20.2
P1:N$10: P1:IC6.7 P1:R22.2 P1:R24.1 P1:R27.1
P1:N$11: P1:IC6.6 P1:R23.2 P1:R24.2 P1:R26.1
P1:N$12: P1:LED3.A P1:R25.1
P1:N$13: P1:C16.1 P1:D8.A P1:IC7.3 P1:R31.2
P1:N$14: P1:IC8.7 P1:R32.2 P1:R34.1 P1:R37.1
P1:N$15: P1:IC8.6 P1:R33.2 P1:R34.2 P1:R36.1
P1:N$16: P1:LED4.A P1:R35.1
P1:N$17: P1:C21.1 P1:D10.A P1:IC9.3 P1:R41.2
P1:N$18: P1:IC10.7 P1:R42.2 P1:R44.1 P1:R47.1
P1:N$19: P1:IC10.6 P1:R43.2 P1:R44.2 P1:R46.1
P1:N$20: P1:LED5.A P1:R45.1
P1:N$21: P1:C26.1 P1:D12.A P1:IC11.3 P1:R51.2
P1:N$22: P1:IC12.7 P1:R52.2 P1:R54.1 P1:R57.1
P1:N$23: P1:IC12.6 P1:R53.2 P1:R54.2 P1:R56.1
P1:N$24: P1:LED6.A P1:R55.1
P1:N$25: P1:C31.1 P1:D14.A P1:IC13.3 P1:R61.2
P1:N$26: P1:IC14.7 P1:R62.2 P1:R64.1 P1:R67.1
P1:N$27: P1:IC14.6 P1:R63.2 P1:R64.2 P1:R66.1
P1:N$28: P1:LED7.A P1:R65.1
P1:N$29: P1:C36.1 P1:D16.A P1:IC15.3 P1:R71.2
P1:N$30: P1:IC16.7 P1:R72.2 P1:R74.1 P1:R77.1
P1:N$31: P1:IC16.6 P1:R73.2 P1:R74.2 P1:R76.1
P1:N$32: P1:LED8.A P1:R75.1
P1:RX: P1:D5.C P1:IC5.4 P1:OK1.4 P1:R5.1 P1:R21.1
P1:RX1: P1:D2.C P1:IC2.4 P1:OK2.4 P1:R2.1 P1:R14.1
P1:RX2: P1:D4.C P1:IC6.4 P1:OK3.4 P1:R20.1 P1:R29.1
P1:RX3: P1:D8.C P1:IC8.4 P1:OK4.4 P1:R31.1 P1:R39.1
P1:RX4: P1:D10.C P1:IC10.4 P1:OK5.4 P1:R41.1 P1:R49.1
P1:RX5: P1:D12.C P1:IC12.4 P1:OK6.4 P1:R51.1 P1:R59.1
P1:RX6: P1:D14.C P1:IC14.4 P1:OK7.4 P1:R61.1 P1:R69.1
P1:RX7: P1:D16.C P1:IC16.4 P1:OK8.4 P1:R71.1 P1:R79.1
P2:LED+: P2:DE.PP P2:IC3.4 P2:IC5.2 P2:IC5.3 P2:R7.2
P2:LED+1: P2:DE1.PP P2:IC1.4 P2:IC2.2 P2:IC2.3 P2:R8.2
P2:LED+2: P2:DE2.PP P2:IC4.4 P2:IC6.2 P2:IC6.3 P2:R25.2
P2:LED+3: P2:DE3.PP P2:IC7.4 P2:IC8.2 P2:IC8.3 P2:R35.2
P2:LED+4: P2:DE4.PP P2:IC9.4 P2:IC10.2 P2:IC10.3 P2:R45.2
P2:LED+5: P2:DE5.PP P2:IC11.4 P2:IC12.2 P2:IC12.3 P2:R55.2
P2:LED+6: P2:DE6.PP P2:IC13.4 P2:IC14.2 P2:IC14.3 P2:R65.2
P2:LED+7: P2:DE7.PP P2:IC15.4 P2:IC16.2 P2:IC16.3 P2:R75.2
P2:N$1: P2:LED1.A P2:R7.1
P2:N$2: P2:IC5.7 P2:R12.2 P2:R15.1 P2:R18.1
P2:N$3: P2:IC5.6 P2:R11.2 P2:R15.2 P2:R17.1
P2:N$4: P2:C3.1 P2:D2.A P2:IC1.3 P2:R2.2
P2:N$5: P2:IC2.7 P2:R3.2 P2:R6.1 P2:R10.1
P2:N$6: P2:IC2.6 P2:R4.2 P2:R6.2 P2:R9.1
P2:N$7: P2:C6.1 P2:D5.A P2:IC3.3 P2:R5.2
P2:N$8: P2:LED2.A P2:R8.1
P2:N$9: P2:C11.1 P2:D4.A P2:IC4.3 P2:R20.2
P2:N$10: P2:IC6.7 P2:R22.2 P2:R24.1 P2:R27.1
P2:N$11: P2:IC6.6 P2:R23.2 P2:R24.2 P2:R26.1
P2:N$12: P2:LED3.A P2:R25.1
P2:N$13: P2:C16.1 P2:D8.A P2:IC7.3 P2:R31.2
P2:N$14: P2:IC8.7 P2:R32.2 P2:R34.1 P2:R37.1
P2:N$15: P2:IC8.6 P2:R33.2 P2:R34.2 P2:R36.1
P2:N$16: P2:LED4.A P2:R35.1
P2:N$17: P2:C21.1 P2:D10.A P2:IC9.3 P2:R41.2
P2:N$18: P2:IC10.7 P2:R42.2 P2:R44.1 P2:R47.1
P2:N$19: P2:IC10.6 P2:R43.2 P2:R44.2 P2:R46.1
P2:N$20: P2:LED5.A P2:R45.1
P2:N$21: P2:C26.1 P2:D12.A P2:IC11.3 P2:R51.2
P2:N$22: P2:IC12.7 P2:R52.2 P2:R54.1 P2:R57.1
P2:N$23: P2:IC12.6 P2:R53.2 P2:R54.2 P2:R56.1
P2:N$24: P2:LED6.A P2:R55.1
P2:N$25: P2:C31.1 P2:D14.A P2:IC13.3 P2:R61.2
P2:N$26: P2:IC14.7 P2:R62.2 P2:R64.1 P2:R67.1
P2:N$27: P2:IC14.6 P2:R63.2 P2:R64.2 P2:R66.1
P2:N$28: P2:LED7.A P2:R65.1
P2:N$29: P2:C36.1 P2:D16.A P2:IC15.3 P2:R71.2
P2:N$30: P2:IC16.7 P2:R72.2 P2:R74.1 P2:R77.1
P2:N$31: P2:IC16.6 P2:R73.2 P2:R74.2 P2:R76.1
P2:N$32: P2:LED8.A P2:R75.1
P2:RX: P2:D5.C P2:IC5.4 P2:OK1.4 P2:R5.1 P2:R21.1
P2:RX1: P2:D2.C P2:IC2.4 P2:OK2.4 P2:R2.1 P2:R14.1
P2:RX2: P2:D4.C P2:IC6.4 P2:OK3.4 P2:R20.1 P2:R29.1
P2:RX3: P2:D8.C P2:IC8.4 P2:OK4.4 P2:R31.1 P2:R39.1
P2:RX4: P2:D10.C P2:IC10.4 P2:OK5.4 P2:R41.1 P2:R49.1
P2:RX5: P2:D12.C P2:IC12.4 P2:OK6.4 P2:R51.1 P2:R59.1
P2:RX6: P2:D14.C P2:IC14.4 P2:OK7.4 P2:R61.1 P2:R69.1
P2:RX7: P2:D16.C P2:IC16.4 P2:OK8.4 P2:R71.1 P2:R79.1
PE1 [pe]: P1:R1.2 P1:TVS1.3 SJ1.1 X2.3
PE2 [pe]: P2:R1.2 P2:TVS1.3 SJ1.2 X3.3
PE3 [pe]: P1:R19.2 P1:TVS2.3 SJ2.1 X5.3
PE4 [pe]: P2:R19.2 P2:TVS2.3 SJ2.2 X6.3
PE5 [pe]: P1:R30.2 P1:TVS3.3 SJ3.1 X8.3
PE6 [pe]: P2:R30.2 P2:TVS3.3 SJ3.2 X9.3
PE7 [pe]: P1:R40.2 P1:TVS4.3 SJ4.1 X11.3
PE8 [pe]: P2:R40.2 P2:TVS4.3 SJ4.2 X12.3
PE9 [pe]: P1:R50.2 P1:TVS5.3 SJ5.1 X14.3
PE10 [pe]: P2:R50.2 P2:TVS5.3 SJ5.2 X15.3
PE11 [pe]: P1:R60.2 P1:TVS6.3 SJ6.1 X17.3
PE12 [pe]: P2:R60.2 P2:TVS6.3 SJ6.2 X18.3
PE13 [pe]: P1:R70.2 P1:TVS7.3 SJ7.1 X20.3
PE14 [pe]: P2:R70.2 P2:TVS7.3 SJ7.2 X21.3
PE15 [pe]: P1:R80.2 P1:TVS8.3 SJ8.1 X23.3
PE16 [pe]: P2:R80.2 P2:TVS8.3 SJ8.2 X24.3
PW:N$1 [power]: PW:IC2.1 PW:IC2.7 PW:IC2.8 PW:R1.2
PW:N$2 [power]: PW:C1.+ PW:C2.1 PW:C6.+ PW:D1.C PW:IC1.6 PW:IC2*.1 PW:R4.1
PW:N$3: PW:IC2.5 PW:R2.2 PW:R3.1
PW:N$4: PW:C7.1 PW:IC2.3
PW:N$5 [power]: PW:D2.C PW:IC2.2 PW:L2.1
PW:N$6: PW:R3.2 PW:R6.1
PW:N$7 [power]: PW:C5.1 PW:C9.+ PW:C10.+ PW:D3.C PW:IC2*1.1 PW:IC2.6 PW:R1.1
PW:N$8 [power]: PW:IC3.1 PW:IC3.7 PW:IC3.8 PW:R7.2
PW:N$9: PW:IC3.5 PW:R10.2 PW:R11.1
PW:N$10: PW:C12.1 PW:IC3.3
PW:N$11 [power]: PW:D4.C PW:IC3.2 PW:L3.1
PW:N$12: PW:R11.2 PW:R12.1
PW:N$13 [power]: PW:C11.1 PW:C14.+ PW:C15.+ PW:D6.C PW:IC2*2.1 PW:IC3.6 PW:R7.1
PW:N$14 [power]: PW:IC4.1 PW:IC4.7 PW:IC4.8 PW:R13.2
PW:N$15: PW:IC4.5 PW:R14.2 PW:R15.1
PW:N$16: PW:C17.1 PW:IC4.3
PW:N$17 [power]: PW:D7.C PW:IC4.2 PW:L4.1
PW:N$18: PW:R15.2 PW:R16.1
PW:N$19 [power]: PW:C16.1 PW:C19.+ PW:C20.+ PW:D8.C PW:IC2*3.1 PW:IC4.6 PW:R13.1
PW:N$20 [power]: PW:IC5.1 PW:IC5.7 PW:IC5.8 PW:R17.2
PW:N$21: PW:IC5.5 PW:R18.2 PW:R19.1
PW:N$22: PW:C22.1 PW:IC5.3
PW:N$23 [power]: PW:D9.C PW:IC5.2 PW:L5.1
PW:N$24: PW:R19.2 PW:R20.1
PW:N$25 [power]: PW:C21.1 PW:C24.+ PW:C25.+ PW:D10.C PW:IC2*4.1 PW:IC5.6 PW:R17.1
PW:N$26 [power]: PW:IC6.1 PW:IC6.7 PW:IC6.8 PW:R21.2
PW:N$27: PW:IC6.5 PW:R22.2 PW:R23.1
PW:N$28: PW:C27.1 PW:IC6.3
PW:N$29 [power]: PW:IC1.1 PW:IC1.7 PW:IC1.8 PW:R4.2
PW:N$30: PW:C4.1 PW:IC1.3
PW:N$31 [power]: PW:D11.C PW:IC6.2 PW:L6.1
PW:N$32: PW:R23.2 PW:R24.1
PW:N$33: PW:R8.2 PW:R9.1
PW:N$34: PW:IC1.5 PW:R5.2 PW:R8.1
PW:N$35 [power]: PW:D5.C PW:IC1.2 PW:L1.1
PW:N$36 [power]: PW:C26.1 PW:C29.+ PW:C30.+ PW:D12.C PW:IC2*5.1 PW:IC6.6 PW:R21.1
PW:N$37 [power]: PW:IC7.1 PW:IC7.7 PW:IC7.8 PW:R25.2
PW:N$38: PW:IC7.5 PW:R26.2 PW:R27.1
PW:N$39: PW:C32.1 PW:IC7.3
PW:N$40 [power]: PW:D13.C PW:IC7.2 PW:L7.1
PW:N$41: PW:R27.2 PW:R28.1
PW:N$42 [power]: PW:C31.1 PW:C34.+ PW:C35.+ PW:D14.C PW:IC2*6.1 PW:IC7.6 PW:R25.1
PW:N$43 [power]: PW:IC8.1 PW:IC8.7 PW:IC8.8 PW:R29.2
PW:N$44: PW:IC8.5 PW:R30.2 PW:R31.1
PW:N$45: PW:C37.1 PW:IC8.3
PW:N$46 [power]: PW:D15.C PW:IC8.2 PW:L8.1
PW:N$47: PW:R31.2 PW:R32.1
PW:N$48 [power]: PW:C36.1 PW:C39.+ PW:C40.+ PW:D16.C PW:IC2*7.1 PW:IC8.6 PW:R29.1
RS1A: P1:D7.C P1:R17.2 P1:TVS1.2 X2.1
RS1A1: P1:D1.C P1:R9.2 P1:TVS2.2 X5.1
RS1A2: P1:D3.C P1:R26.2 P1:TVS3.2 X8.1
RS1A3: P1:D6.C P1:R36.2 P1:TVS4.2 X11.1
RS1A4: P1:D9.C P1:R46.2 P1:TVS5.2 X14.1
RS1A5: P1:D11.C P1:R56.2 P1:TVS6.2 X17.1
RS1A6: P1:D13.C P1:R66.2 P1:TVS7.2 X20.1
RS1A7: P1:D15.C P1:R76.2 P1:TVS8.2 X23.1
RS1B: P1:D7.A P1:R18.2 P1:TVS1.1 X2.2
RS1B1: P1:D1.A P1:R10.2 P1:TVS2.1 X5.2
RS1B2: P1:D3.A P1:R27.2 P1:TVS3.1 X8.2
RS1B3: P1:D6.A P1:R37.2 P1:TVS4.1 X11.2
RS1B4: P1:D9.A P1:R47.2 P1:TVS5.1 X14.2
RS1B5: P1:D11.A P1:R57.2 P1:TVS6.1 X17.2
RS1B6: P1:D13.A P1:R67.2 P1:TVS7.1 X20.2
RS1B7: P1:D15.A P1:R77.2 P1:TVS8.1 X23.2
RS2A: P2:D7.C P2:R17.2 P2:TVS1.2 X3.1
RS2A1: P2:D1.C P2:R9.2 P2:TVS2.2 X6.1
RS2A2: P2:D3.C P2:R26.2 P2:TVS3.2 X9.1
RS2A3: P2:D6.C P2:R36.2 P2:TVS4.2 X12.1
RS2A4: P2:D9.C P2:R46.2 P2:TVS5.2 X15.1
RS2A5: P2:D11.C P2:R56.2 P2:TVS6.2 X18.1
RS2A6: P2:D13.C P2:R66.2 P2:TVS7.2 X21.1
RS2A7: P2:D15.C P2:R76.2 P2:TVS8.2 X24.1
RS2B: P2:D7.A P2:R18.2 P2:TVS1.1 X3.2
RS2B1: P2:D1.A P2:R10.2 P2:TVS2.1 X6.2
RS2B2: P2:D3.A P2:R27.2 P2:TVS3.1 X9.2
RS2B3: P2:D6.A P2:R37.2 P2:TVS4.1 X12.2
RS2B4: P2:D9.A P2:R47.2 P2:TVS5.1 X15.2
RS2B5: P2:D11.A P2:R57.2 P2:TVS6.1 X18.2
RS2B6: P2:D13.A P2:R67.2 P2:TVS7.1 X21.2
RS2B7: P2:D15.A P2:R77.2 P2:TVS8.1 X24.2
VCC1 [power]: DC1.2 P1:C1.1 P1:C2.1 P1:C5.+ P1:C7.+ P1:IC3.5 P1:IC5.8 P1:J2.1 P1:J2.2 P1:OK1.6 P1:R11.1 P1:R16.2 P1:R21.2 PW:C3.1 PW:IC2*.3 PW:L1.2 PW:R9.2
VCC2 [power]: DC1.4 P2:C1.1 P2:C2.1 P2:C5.+ P2:C7.+ P2:IC3.5 P2:IC5.8 P2:OK1.6 P2:R11.1 P2:R16.2 P2:R21.2
VCC3 [power]: DC2.2 P1:C4.1 P1:C8.1 P1:C9.+ P1:C10.+ P1:IC1.5 P1:IC2.8 P1:J1.1 P1:J1.2 P1:OK2.6 P1:R4.1 P1:R13.2 P1:R14.2 PW:C8.1 PW:IC2*1.3 PW:L2.2 PW:R6.2
VCC4 [power]: DC2.4 P2:C4.1 P2:C8.1 P2:C9.+ P2:C10.+ P2:IC1.5 P2:IC2.8 P2:OK2.6 P2:R4.1 P2:R13.2 P2:R14.2
VCC5 [power]: DC3.2 P1:C12.1 P1:C13.1 P1:C14.+ P1:C15.+ P1:IC4.5 P1:IC6.8 P1:J3.1 P1:J3.2 P1:OK3.6 P1:R23.1 P1:R28.2 P1:R29.2 PW:C13.1 PW:IC2*2.3 PW:L3.2 PW:R12.2
VCC6 [power]: DC3.4 P2:C12.1 P2:C13.1 P2:C14.+ P2:C15.+ P2:IC4.5 P2:IC6.8 P2:OK3.6 P2:R23.1 P2:R28.2 P2:R29.2
VCC7 [power]: DC4.2 P1:C17.1 P1:C18.1 P1:C19.+ P1:C20.+ P1:IC7.5 P1:IC8.8 P1:J4.1 P1:J4.2 P1:OK4.6 P1:R33.1 P1:R38.2 P1:R39.2 PW:C18.1 PW:IC2*3.3 PW:L4.2 PW:R16.2
VCC8 [power]: DC4.4 P2:C17.1 P2:C18.1 P2:C19.+ P2:C20.+ P2:IC7.5 P2:IC8.8 P2:OK4.6 P2:R33.1 P2:R38.2 P2:R39.2
VCC9 [power]: DC5.2 P1:C22.1 P1:C23.1 P1:C24.+ P1:C25.+ P1:IC9.5 P1:IC10.8 P1:J5.1 P1:J5.2 P1:OK5.6 P1:R43.1 P1:R48.2 P1:R49.2 PW:C23.1 PW:IC2*4.3 PW:L5.2 PW:R20.2
VCC10 [power]: DC5.4 P2:C22.1 P2:C23.1 P2:C24.+ P2:C25.+ P2:IC9.5 P2:IC10.8 P2:OK5.6 P2:R43.1 P2:R48.2 P2:R49.2
VCC11 [power]: DC6.2 P1:C27.1 P1:C28.1 P1:C29.+ P1:C30.+ P1:IC11.5 P1:IC12.8 P1:J6.1 P1:J6.2 P1:OK6.6 P1:R53.1 P1:R58.2 P1:R59.2 PW:C28.1 PW:IC2*5.3 PW:L6.2 PW:R24.2
VCC12 [power]: DC6.4 P2:C27.1 P2:C28.1 P2:C29.+ P2:C30.+ P2:IC11.5 P2:IC12.8 P2:OK6.6 P2:R53.1 P2:R58.2 P2:R59.2
VCC13 [power]: DC7.2 P1:C32.1 P1:C33.1 P1:C34.+ P1:C35.+ P1:IC13.5 P1:IC14.8 P1:J7.1 P1:J7.2 P1:OK7.6 P1:R63.1 P1:R68.2 P1:R69.2 PW:C33.1 PW:IC2*6.3 PW:L7.2 PW:R28.2
VCC14 [power]: DC7.4 P2:C32.1 P2:C33.1 P2:C34.+ P2:C35.+ P2:IC13.5 P2:IC14.8 P2:OK7.6 P2:R63.1 P2:R68.2 P2:R69.2
VCC15 [power]: DC8.2 P1:C37.1 P1:C38.1 P1:C39.+ P1:C40.+ P1:IC15.5 P1:IC16.8 P1:J8.1 P1:J8.2 P1:OK8.6 P1:R73.1 P1:R78.2 P1:R79.2 PW:C38.1 PW:IC2*7.3 PW:L8.2 PW:R32.2
VCC16 [power]: DC8.4 P2:C37.1 P2:C38.1 P2:C39.+ P2:C40.+ P2:IC15.5 P2:IC16.8 P2:OK8.6 P2:R73.1 P2:R78.2 P2:R79.2